# Altium PCB Board.PcbDoc (part 2 of 3)
Units mm, origin at the board's own origin, x right, y up, seen from the top; angles counter-clockwise.
Board outline 120 x 89 mm, 2 copper layers (Top Layer, Bottom Layer); 165 components, 194 nets, 816 pads, 265 vias.
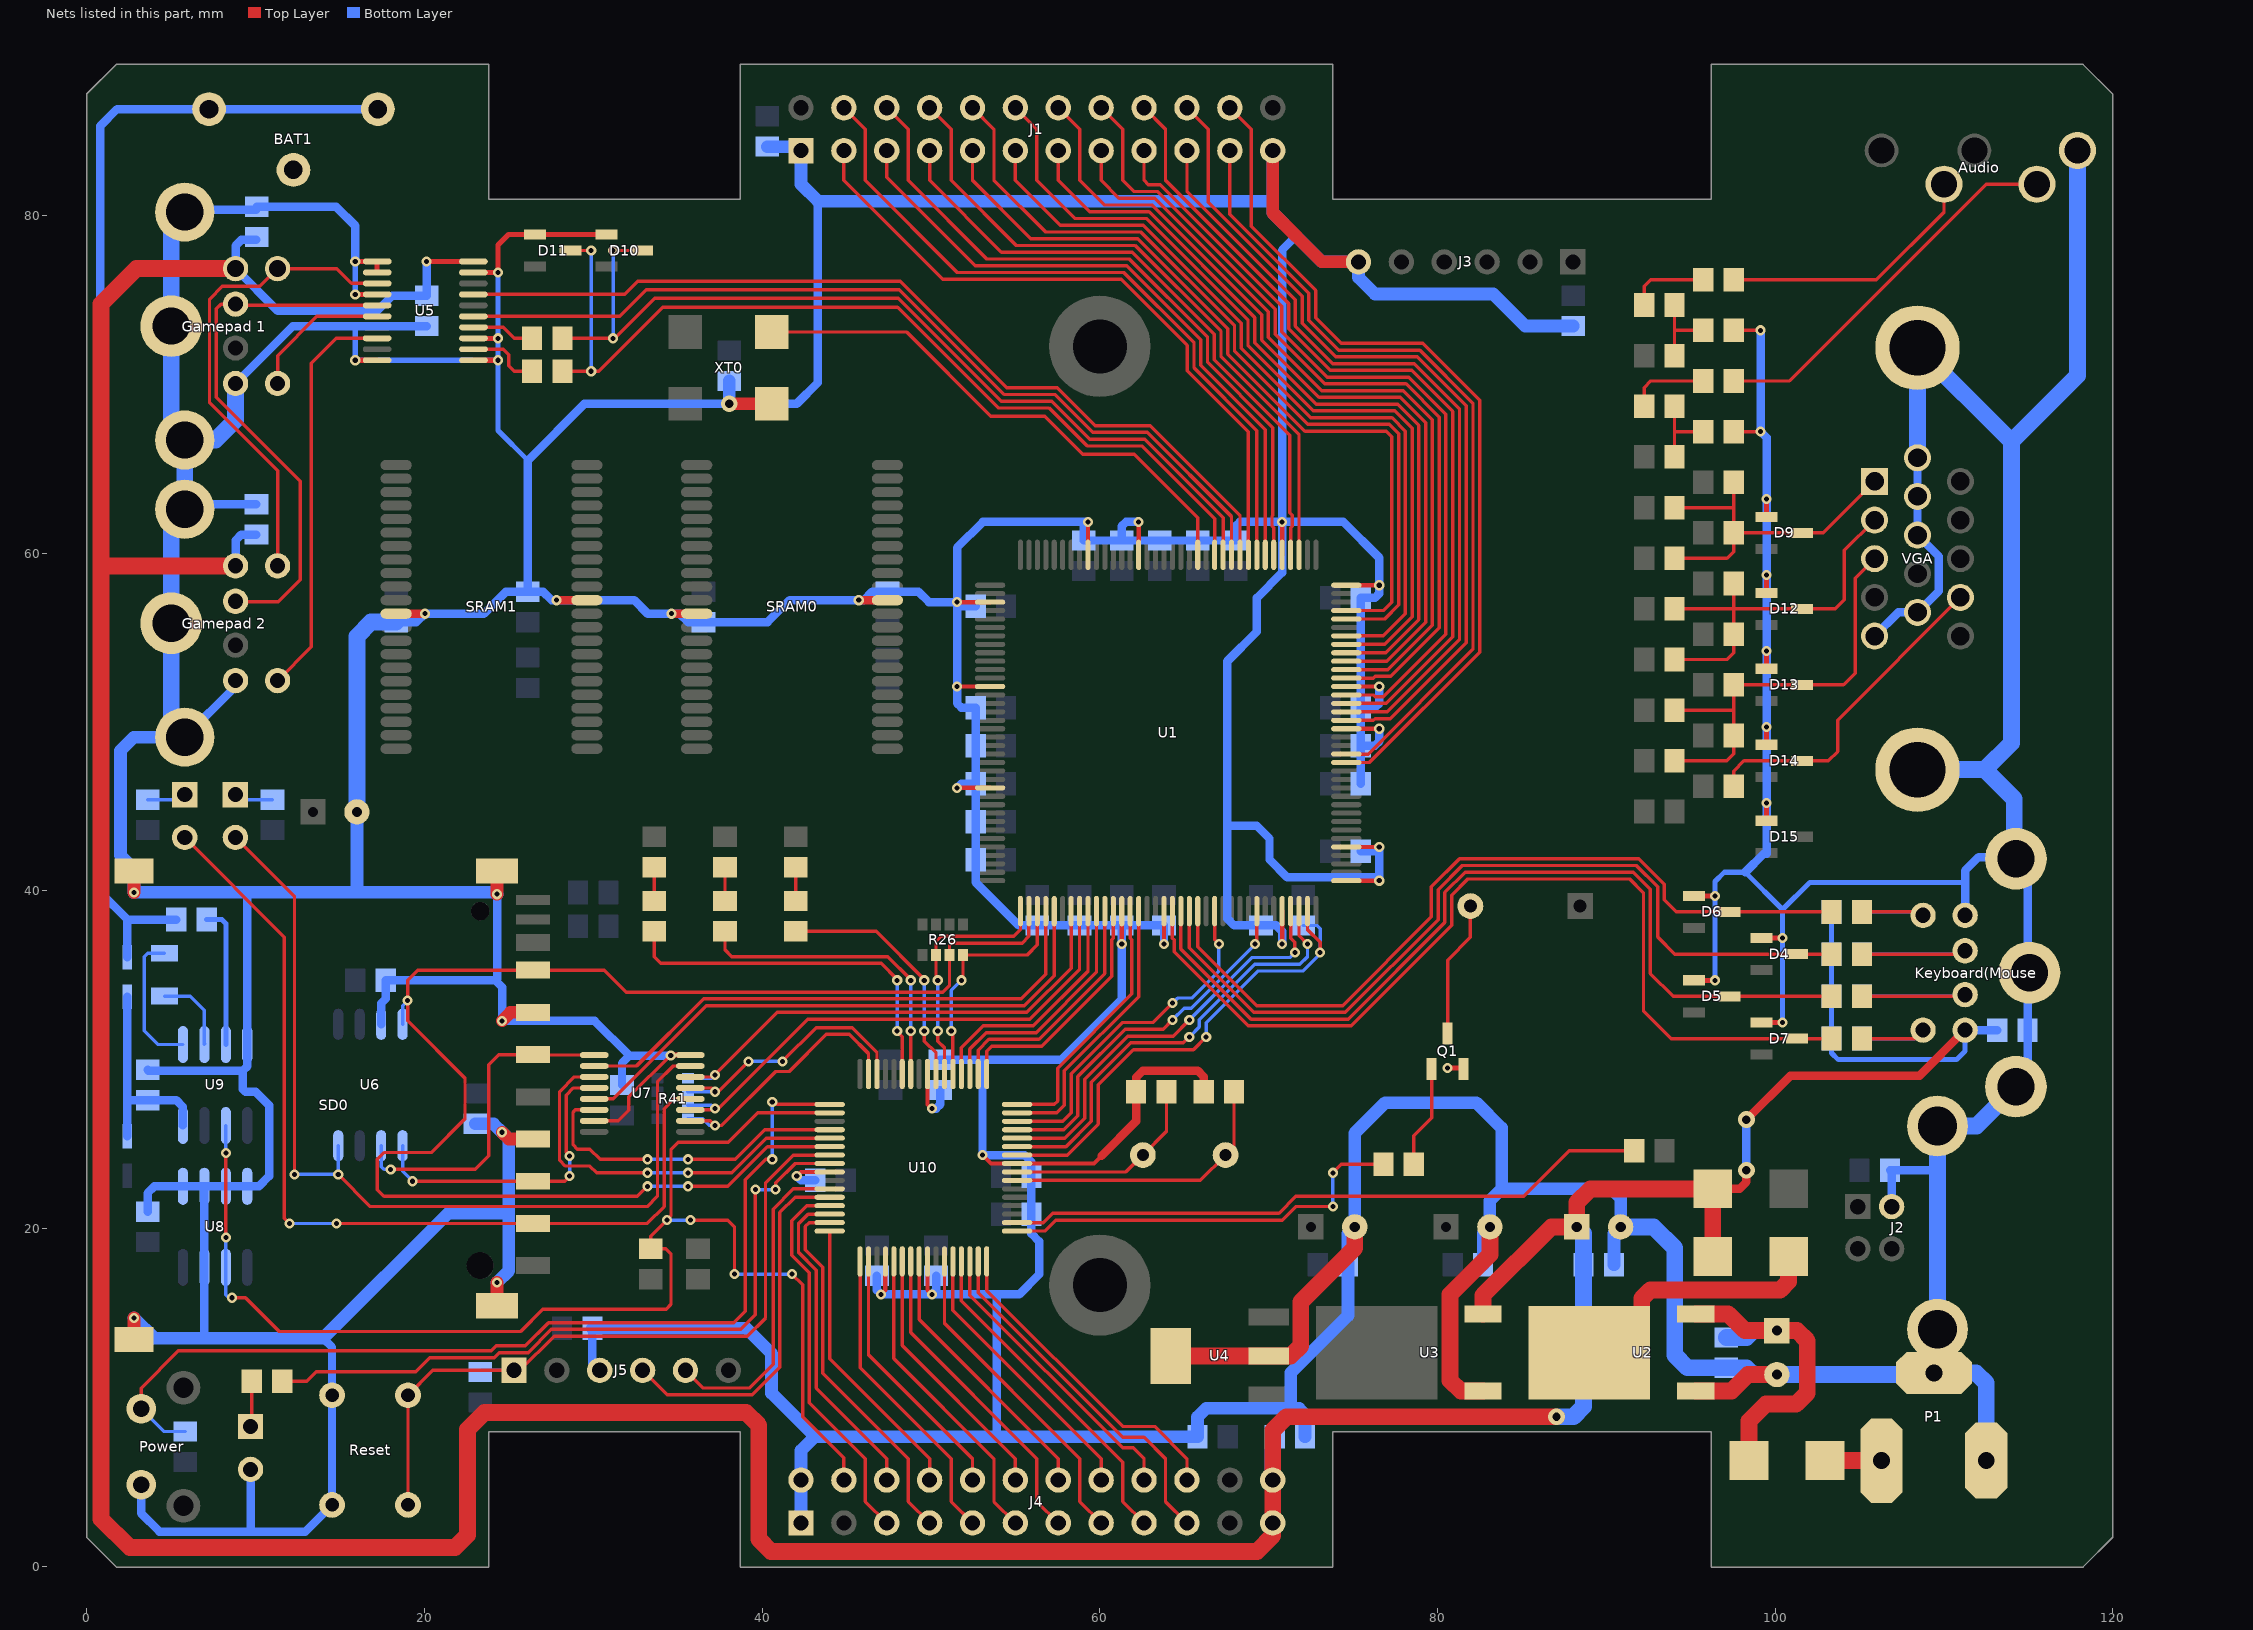
[diagram p2: the nets of this part, all layers, seen from the top]

## Via types
v1: diameter 0.6, hole 0.3, Top Layer to Bottom Layer, tented both sides, 246 vias
v2: diameter 1, hole 0.5, Top Layer to Bottom Layer, tented both sides, 18 vias
v3: diameter 1.5, hole 0.8, Top Layer to Bottom Layer, tented both sides, 1 vias

## Nets (pads, with @x,y where several pads share a name; then routed paths per layer and width w, separated by ;. In a path a pad name is that pad's centre, name@x,y a point inside that pad or via, vN(x,y) a via of type N, cw(c..) or ccw(c..) an arc to the next point about the centre after c; other vN are vias at no path point) (continued)
+5V: "Gamepad 1.5" "Gamepad 2.5" C26.1 C28.2 C51.2 C55.2 C57.2 C59.2 C60.2 D1.2 D3.2 J4.23 J4.24 Keyboard(Mouse.5 R15.1 R16.1 R17.1 R18.1 U3.3 U5.20 | length 298.3
  Top Layer w0.3: v1(20.125,77.275) U5.20@22.9,77.275
  Top Layer w0.5: D1.2@96.3,22.35 97.891,22.35 98.3,22.759 v2(98.3,23.45) ; v2(98.3,26.45) 100.9,29.05 108.55,29.05 111.25,31.75
  Top Layer w1: 8.81,59.25 0.85,59.25 ; 8.81,76.85 2.95,76.85 0.85,74.75 0.85,59.25 ; U3.3@82.7,14.93 82.7,16.05 86.75,20.1 C26.1@88.25,20.1 88.25,21.55 89.05,22.35 D1.2@96.3,22.35 D3.2@96.3,18.35 ; v2(87.05,8.85) 71.05,8.85 70.24,8.04 J4.24@70.24,5.1 J4.23@70.24,2.56 70.24,1.82 69.3,0.88 40.52,0.88 39.8,1.6 39.8,8.35 39.05,9.1 23.55,9.1 22.55,8.1 22.55,1.85 21.8,1.1 2.55,1.1 0.85,2.8 0.85,59.25
  Bottom Layer w0.3: R17.1@103.34,38.75 R18.1@103.34,31.25 103.34,30.4 103.74,30 110.74,30 111.25,30.51 111.25,31.75
  Bottom Layer w0.5: 8.81,59.25 8.81,60.76 9.15,61.1 C59.2@10.05,61.1 ; C57.2@10.05,78.55 9.15,78.55 8.81,78.21 8.81,76.85 11.31,74.35 17.2,74.35 18.1,75.25 C60.2@20.125,75.25 v1(20.125,77.275) ; v2(98.3,23.45) v2(98.3,26.45) ; 111.25,31.75 C51.2@113.15,31.75
  Bottom Layer w0.75: C55.2@70.24,7.56 C55.2@70.356,7.676
  Bottom Layer w1: J4.24@70.24,5.1 C55.2@70.24,7.56 ; v2(87.05,8.85) 88.05,8.85 88.65,9.45 C28.2@88.65,17.85 88.65,19.7 C26.1@88.25,20.1
BLUE: D13.3 R9.1 R10.1 R11.1 R12.1 VGA.3 | length 26
  Top Layer w0.2: R12.1@94.04,47.7 97.131,47.7 97.54,48.11 R11.1@97.54,49.2 R9.1@97.54,52.2 D13.3@101.59,52.2 104.05,52.2 104.74,52.89 104.74,58.52 VGA.3@105.89,59.67 ; R10.1@94.04,50.7 97.531,50.7
BUZZER: R47.1 U10.33 | length 24.5
  Top Layer w0.2: U10.33@55.1,19.85 56.75,19.85 57.4,20.5 70.8,20.5 71.6,21.3 v1(73.8,21.3) ; v1(73.8,23.3) 74.3,23.8 R47.1@76.8,23.8
  Bottom Layer w0.2: v1(73.8,21.3) v1(73.8,23.3)
CCLK: U1.70 U10.43 | length 26.4
  Top Layer w0.2: U10.43@55.1,24.85 57.997,24.85 59.5,26.353 59.5,28.672 61.827,30.998 64.948,30.998 v1(65.3,31.35) ; U1.70@71.8,38.8 71.8,37.35 v1(72.3,36.85)
  Bottom Layer w0.2: v1(65.3,31.35) 65.316,31.35 65.9,31.934 65.9,32.366 69.184,35.65 71.85,35.65 72.3,36.1 v1(72.3,36.85)
CLOCK: U1.123 XT0.3 | length 32.1
  Top Layer w0.2: XT0.3@40.425,73.1 48.55,73.1 53.55,68.1 56.74,68.1 58.99,65.85 62.05,65.85 65.8,62.1 U1.123@65.8,59.9
COMM1: U1.51 U10.47 | length 16.3
  Top Layer w0.2: U10.47@55.1,26.85 57.45,26.85 57.9,27.3 57.9,29.334 62.3,33.734 U1.51@62.3,38.8
COMM2: U1.50 U10.48 | length 15.6
  Top Layer w0.2: U10.48@55.1,27.35 57.3,27.35 57.5,27.55 57.5,29.5 61.9,33.9 61.9,37.099 61.8,37.199 U1.50@61.8,38.8
COMM3: U1.48 U10.49 | length 14.5
  Top Layer w0.2: U10.49@53.3,29.15 53.3,30.5 53.6,30.8 56.565,30.8 60.7,34.935 60.7,37.099 60.8,37.199 U1.48@60.8,38.8
COMM4: U1.47 U10.50 | length 14.5
  Top Layer w0.2: U10.50@52.8,29.15 52.8,30.566 53.434,31.2 56.4,31.2 60.3,35.1 U1.47@60.3,38.8
COMM5: U1.46 U10.51 | length 14.5
  Top Layer w0.2: U10.51@52.3,29.15 52.3,30.631 53.269,31.6 56.234,31.6 59.8,35.166 U1.46@59.8,38.8
COMM6: U1.45 U10.52 | length 14.5
  Top Layer w0.2: U10.52@51.8,29.15 51.8,30.697 53.103,32 56.068,32 59.3,35.232 U1.45@59.3,38.8
DIN: U1.65 U10.45 | length 22.1
  Top Layer w0.2: U10.45@55.1,25.85 57.866,25.85 58.7,26.684 58.7,29.003 61.495,31.798 63.748,31.798 v1(64.3,32.35) ; v1@69.24,36.85 v1(69.2,36.85) 69.3,36.95 U1.65@69.3,38.8
  Bottom Layer w0.2: v1(64.3,32.35) 65,33.05 65.416,33.05 69.2,36.834 v1(69.2,36.85)
DONE: R39.2 U1.71 U10.42 | length 30.1
  Top Layer w0.2: U10.42@55.1,24.35 58.063,24.35 59.9,26.187 59.9,28.506 61.992,30.598 65.548,30.598 v1(66.3,31.35) ; U1.71@72.3,38.8 72.3,37.699 73.05,36.949 v1(73.05,36.35)
  Bottom Layer w0.2: v1(66.3,31.35) 66.3,32.2 69.35,35.25 72.016,35.25 73.05,36.284 v1(73.05,36.35) 73.05,37.75 72.85,37.95 R39.2@72.05,37.95
FFLCS: R41.8 U1.43 U7.6 | length 30.3
  Top Layer w0.2: U7.6@35.75,28.975 37.075,28.975 v1(37.2,29.1) 40.9,32.8 55.684,32.8 58.3,35.416 U1.43@58.3,38.8
  Bottom Layer w0.2: R41.8@35.625,28.925 R41.8@35.6,28.9 37,28.9 v1(37.2,29.1)
FMOSI: U1.41 U7.13 | length 34.1
  Top Layer w0.2: U7.13@30.05,27.675 31.175,27.675 36.7,33.2 55.519,33.2 57.3,34.981 U1.41@57.3,38.8
FSCK: U1.40 U7.10 | length 32.7
  Top Layer w0.2: U7.10@30.05,29.625 32.559,29.625 36.534,33.6 55.353,33.6 56.8,35.047 U1.40@56.8,38.8
FSDCS: R41.4 U1.44 U7.3 | length 31.5
  Top Layer w0.2: U7.3@35.75,27.025 v1@37.125,27.025 ; v1(37.2,27.1) 37.4,27.1 42.7,32.4 55.85,32.4 58.8,35.35 U1.44@58.8,38.8
  Bottom Layer w0.2: R41.4@35.6,27.3 37,27.3 v1(37.2,27.1)
GND: "Gamepad 1.3" "Gamepad 1.MH1" "Gamepad 1.MH2" "Gamepad 1.MH3" "Gamepad 2.3" "Gamepad 2.MH1" "Gamepad 2.MH2" "Gamepad 2.MH3" Audio.1 BAT1.2 C1.1 C2.1 C3.1 C4.1 C5.1 C6.1 C7.1 C8.1 C9.1 C10.1 C11.1 C12.1 C13.1 C14.1 C15.1 C16.1 C17.1 C18.1 C19.1 C20.1 C21.1 C22.2 C23.1 C24.1 C25.2 C26.2 C27.2 C28.1 C29.1 C30.1 C31.1 C32.1 C33.1 C34.1 C35.1 C36.1 C37.1 C38.1 C39.2 C41.1 C43.1 C44.1 C45.1 C46.2 C47.2 C48.2 C49.2 C50.1 C51.1 C52.2 C53.1 C54.1 C55.1 C56.1 C57.1 C58.1 C59.1 C60.1 C61.2 C62.2 D4.1 D5.1 D6.1 D7.1 D8.2 D9.1 D10.1 D11.1 D12.1 D13.1 D14.1 D15.1 J1.1 J1.23 J2.4 J2.5 J2.6 J3.6 J4.1 J4.2 J5.3 Keyboard(Mouse.3 Keyboard(Mouse.MH1 Keyboard(Mouse.MH2 Keyboard(Mouse.MH3 P1.2 P1.3 Power.1 Q1.2 Reset.2 SD0.3 SD0.6 SD0.12 SD0.13 SD0.14 SD0.15 SRAM0.12 SRAM0.34 SRAM1.12 SRAM1.34 U1.3 U1.13 U1.25 U1.49 U1.54 U1.68 U1.73 U1.77 U1.91 U1.96 U1.108 U1.113 U1.130 U1.136 U2.1 U3.1 U4.2 U4.4 U5.1 U5.2 U5.4 U5.10 U5.11 U5.13 U5.19 U6.7 U7.8 U7.15 U8.1 U8.2 U8.3 U8.4 U8.7 U9.4 U10.9 U10.20 U10.25 U10.41 VGA.5 VGA.6 VGA.7 VGA.8 VGA.10 VGA.16 VGA.17 XT0.2 | length 1093.5
  Top Layer w0.2: U7.15@30.05,26.375 31.475,26.375 32.1,27 32.1,27.8 v1@34.575,30.275 ; C41.1@97.54,67.2 v1(99.14,67.2) ; C43.1@97.54,73.2 v1(99.14,73.2)
  Top Layer w0.254: v1(42.05,23.1) 42.3,23.35 U10.9@44,23.35 ; v1(47.05,16.1) 47.3,16.35 U10.20@47.3,18.05 ; U10.25@49.8,18.05 49.8,16.35 v1(50.05,16.1) ; v1(51.55,46.1) U1.25@53.5,46.1 ; v1(51.55,52.1) U1.13@53.5,52.1 ; v1(51.55,57.1) U1.3@53.5,57.1 ; v1(53.05,24.35) 53.55,23.85 U10.41@55.1,23.85 59.65,23.85 60.1,24.3 ; U1.136@59.3,59.9 v1(59.3,61.85) ; v1(61.3,36.85) U1.49@61.3,38.8 ; U1.130@62.3,59.9 v1(62.3,61.85) ; v1(63.8,36.85) U1.54@63.8,38.8 ; v1(70.8,36.85) U1.68@70.8,38.8 ; U1.113@70.8,59.9 v1(70.8,61.85) ; U1.73@74.6,40.6 v1(76.55,40.6) ; U1.77@74.6,42.6 v1(76.55,42.6) ; U1.91@74.6,49.6 v1(76.55,49.6) ; U1.96@74.6,52.1 v1(76.55,52.1) ; U1.108@74.6,58.1 v1(76.55,58.1)
  Top Layer w0.3: v1(15.9,71.425) U5.10@17.2,71.425 ; v1(15.9,75.325) U5.4@17.2,75.325 ; v1(15.9,77.275) U5.1@17.2,77.275 U5.2@17.2,76.625 ; U5.11@22.9,71.425 v1(24.35,71.425) ; U5.13@22.9,72.725 v1(24.35,72.725) ; U5.19@22.9,76.625 v1(24.35,76.625) 24.35,78.25 24.975,78.875 D11.1@26.55,78.875 D10.1@30.775,78.875 ; v1@34.575,30.275 U7.8@35.75,30.275 ; v1(80.6,29.5) Q1.2@81.5,29.5 ; D5.1@95.19,34.7 v1(96.44,34.7) ; D6.1@95.19,39.7 v1(96.44,39.7) ; D7.1@99.19,32.2 v1(100.44,32.2) ; D4.1@99.19,37.2 v1(100.44,37.2) ; D15.1@99.49,44.15 v1(99.49,45.2) ; D14.1@99.49,48.65 v1(99.49,49.7) ; D13.1@99.49,53.15 v1(99.49,54.2) ; D12.1@99.49,57.65 v1(99.49,58.7) ; D9.1@99.49,62.15 v1(99.49,63.2)
  Top Layer w0.5: SRAM1.34@18.323,56.414 v1(20.023,56.414) ; v1(27.823,57.214) SRAM1.12@29.623,57.214 ; v1@34.575,30.275 34.575,30.253 v1(34.588,30.24) ; v1(34.623,56.414) SRAM0.34@36.123,56.414 ; v1(45.723,57.214) SRAM0.12@47.423,57.214 ; 60.1,24.3 62.15,26.35 C54.1@62.15,28.1 62.15,28.95 62.55,29.35 65.8,29.35 66.15,29 C53.1@66.15,28.1
  Top Layer w0.75: SD0.15@2.8,13.425 v1(2.8,14.7) ; v1(2.8,39.9) SD0.13@2.8,41.175 ; SD0.14@24.3,15.425 v1(24.3,16.8) ; v1(24.3,39.8) SD0.12@24.3,41.175 ; v1(24.6,25.7) 25,25.3 SD0.3@26.425,25.3 ; v1(24.6,32.3) 25.1,32.8 SD0.6@26.425,32.8 ; v2(38.05,68.85) XT0.2@40.425,68.85 ; J1.23@70.24,83.84 70.24,80.16 73.15,77.25 J3.6@75.32,77.25
  Top Layer w1: U4.4@64.2,12.45 U4.2@70,12.45 71.3,12.45 71.9,13.05 71.9,15.65 75.1,18.85 C25.2@75.1,20.1 ; U3.1@82.7,10.37 81.38,10.37 80.75,11 80.75,16.1 83.1,18.45 C27.2@83.1,20.1 ; U2.1@95.3,10.37 97.42,10.37 98.4,11.35 C22.2@100.1,11.35
  Bottom Layer w0.3: 15.9,73.45 v1(15.9,71.425) v1(24.35,71.425) ; v1(15.9,75.325) v1(15.9,77.275) ; v1(24.35,76.625) v1(24.35,72.725) v1(24.35,71.425) ; 26.123,65.498 24.35,67.271 v1(24.35,71.425) ; v1(96.44,34.7) v1(96.44,39.7) 96.44,40.549 96.99,41.1 98.23,41.1 100.44,38.89 ; v1(100.44,32.2) v1(100.44,37.2) 100.44,38.89 ; 111.25,40.5 102.05,40.5 100.44,38.89
  Bottom Layer w0.5: Power.1@3.225,4.825 3.225,3.125 4.3,2.05 12.95,2.05 Reset.2@14.525,3.625 Reset.2@14.525,10.125 14.525,12.975 14,13.5 ; C39.2@3.6,21 3.6,22.1 4,22.5 U8.1@5.695,22.5 U8.2@6.965,22.5 ; C62.2@3.6,29.4 3.65,29.35 9.25,29.35 ; 5.8,49.1 8.81,52.11 8.81,52.45 ; 5.8,62.6 6.1,62.9 C59.1@10.05,62.9 ; 5.8,80.2 5.95,80.35 C57.1@10.05,80.35 ; 6.965,13.5 U8.7@6.965,17.7 U8.2@6.965,22.5 ; 8.81,70.05 12.21,73.45 15.9,73.45 C60.1@20.125,73.45 ; 9.505,39.82 U9.4@9.505,30.9 9.505,29.605 9.25,29.35 ; 9.7,2.075 D8.2@9.7,5.735 ; C57.1@10.07,80.52 14.77,80.52 15.9,79.39 v1(15.9,77.275) ; U6.7@17.435,32.1 17.435,33.335 17.7,33.6 C58.1@17.7,34.7 24.2,34.7 ; C33.1@18.323,55.914 19.523,55.914 v1(20.023,56.414) 23.523,56.414 24.823,57.714 C32.1@26.123,57.714 ; v1(24.3,39.8) 24.3,34.8 24.2,34.7 ; C45.1@29.95,14.1 29.95,12.03 J5.3@30.38,11.6 ; C38.1@31.7,28.5 31.7,29.8 32.14,30.24 ; v1(34.588,30.24) 32.14,30.24 ; v1(42.05,23.1) 42.3,22.85 C48.2@43.15,22.85 ; 43.3,80.85 43.3,70.1 42.05,68.85 v2(38.05,68.85) 29.475,68.85 26.123,65.498 C32.1@26.123,57.714 ; C49.2@46.8,17.2 46.8,16.35 v1(47.05,16.1) v1(50.05,16.1) ; C52.2@50.3,17.2 50.3,16.35 v1(50.05,16.1) ; C44.1@50.55,30 53.05,30 ; v1(51.55,46.1) 51.8,46.35 C12.1@52.65,46.35 ; C1.1@52.65,56.85 51.8,56.85 v1(51.55,57.1) ; 53.89,7.676 53.89,16.1 ; v1(62.3,61.85) 61.55,61.85 61.3,61.6 C16.1@61.3,60.75 ; v1(63.8,36.85) C14.1@63.8,37.95 C19.1@61.3,37.95 ; v1(70.8,36.85) 70.8,37.6 70.45,37.95 C5.1@69.55,37.95 67.95,37.95 67.55,38.35 67.55,43.85 ; 71.625,78.775 70.8,77.95 v1(70.8,61.85) ; C6.1@75.45,42.35 76.3,42.35 v1(76.55,42.6) v1(76.55,40.6) 76.35,40.8 71.1,40.8 70.05,41.85 70.05,43.1 69.3,43.85 67.55,43.85 ; C7.1@75.45,46.35 C20.1@75.45,48.6 ; v1(76.55,49.6) 76.55,48.85 76.3,48.6 C20.1@75.45,48.6 ; v1(76.55,52.1) 76.55,51.1 76.3,50.85 C15.1@75.45,50.85 ; 98.23,41.1 99.33,42.2 99.49,42.2 v1(99.49,45.2) v1(99.49,49.7) v1(99.49,54.2) v1(99.49,58.7) v1(99.49,63.2) 99.49,66.85 v1(99.14,67.2) v1(99.14,73.2) ; VGA.5@105.89,55.09 107.29,56.49 VGA.10@108.43,56.49 109.7,57.76 109.7,59.8 VGA.8@108.43,61.07 VGA.7@108.43,63.36 VGA.6@108.43,65.65 ; J2.4@106.9,21.3 106.9,23.35 C23.1@106.8,23.45 109.61,23.45 ; 111.25,38.55 111.25,40.5 111.25,41.2 112.05,42 114.16,42 114.26,41.9 114.95,41.21 114.95,35.04 ; 114.26,28.4 114.95,29.09 C51.1@114.95,31.75 114.95,35.04 ; 115.06,35.15 114.95,35.04 ; U8.2@6.965,22.5 U8.3@8.235,22.5 U8.4@9.505,22.5 10.2,22.5 10.8,23.1 10.8,27.3 10,28.1 9.4,28.1 9.25,28.25 9.25,29.35 ; 24.2,34.7 24.6,34.3 v1(24.6,32.3) 30.079,32.3 32.14,30.24 ; C32.1@26.123,57.714 27.023,57.714 27.523,57.214 v1(27.823,57.214) 32.423,57.214 33.223,56.414 v1(34.623,56.414) 35.123,56.414 35.623,55.914 C31.1@36.523,55.914 40.323,55.914 41.623,57.214 v1(45.723,57.214) 46.023,57.214 46.523,57.714 C30.1@47.423,57.714 49.261,57.714 49.875,57.1 v1(51.55,57.1) ; v1(50.05,16.1) 53.89,16.1 ; v1(51.55,57.1) 51.55,60.325 53.075,61.85 v1(59.3,61.85) 59.05,61.6 C11.1@59.05,60.75 C16.1@61.3,60.75 ; v1(51.55,57.1) v1(51.55,52.1) 51.55,51.1 51.8,50.85 C2.1@52.65,50.85 C17.1@52.65,48.6 C12.1@52.65,46.35 ; C12.1@52.65,46.35 C18.1@52.65,44.1 C3.1@52.65,41.85 52.65,40.5 55.2,37.95 C13.1@56.3,37.95 C19.1@61.3,37.95 ; 53.05,30 v1(53.05,24.35) 55.55,24.35 55.95,23.95 C46.2@55.95,23.1 C47.2@55.95,20.85 55.95,19.7 56.409,19.241 56.409,17.284 55.225,16.1 53.89,16.1 ; 53.05,30 57.725,30 61.3,33.575 v1(61.3,36.85) C19.1@61.3,37.95 ; C16.1@61.3,60.75 C10.1@65.8,60.75 C9.1@68.05,60.75 68.05,61.6 68.3,61.85 v1(70.8,61.85) ; 67.55,43.85 67.55,53.6 69.3,55.35 69.3,57.35 70.8,58.85 v1(70.8,61.85) ; v1(70.8,61.85) 74.425,61.85 76.55,59.725 v1(76.55,58.1) 76.55,57.6 76.3,57.35 C8.1@75.45,57.35 C15.1@75.45,50.85 ; C20.1@75.45,48.6 C15.1@75.45,50.85
  Bottom Layer w0.75: v1(2.8,14.7) 4,13.5 14,13.5 21.4,20.9 25,20.9 ; v1(2.8,39.9) 2.8,41.3 2,42.1 2,48.3 2.8,49.1 5.8,49.1 ; v1@2.825,39.925 16,39.925 ; 5,61.8 5.8,62.6 ; C61.2@16,44.675 16,39.925 ; C34.1@23,26.2 24.1,26.2 v1(24.6,25.7) 25,25.3 25,20.9 ; v1(24.3,16.8) 25,17.5 25,20.9 ; v1(24.3,39.8) 24.176,39.925 16,39.925 ; C45.1@29.95,14.1 39.05,14.1 40.55,12.6 40.55,10.252 43.126,7.676 ; v2(38.05,68.85) C35.1@38.05,70.2 ; C37.1@40.3,84.08 42.06,84.08 J1.1@42.3,83.84 42.3,81.85 43.3,80.85 70.24,80.85 ; J4.1@42.3,2.56 J4.2@42.3,5.1 42.3,6.85 43.126,7.676 ; J1.23@70.24,83.84 70.24,80.85 ; C55.1@72.156,7.676 72.156,8.994 71.8,9.35 71.3,9.35 ; C29.1@82.7,17.85 82.7,19.7 C27.2@83.1,20.1 83.1,21.65 83.8,22.35 ; C36.1@88.05,73.45 85.2,73.45 83.3,75.35 76.3,75.35 75.32,76.33 J3.6@75.32,77.25 73.15,77.25 71.625,78.775 70.24,80.16 70.24,80.85 ; C28.1@90.45,17.85 90.45,19.7 C26.2@90.85,20.1 90.85,21.8 90.3,22.35 83.8,22.35 ; 43.126,7.676 53.89,7.676 C56.1@65.784,7.676 65.784,8.834 66.3,9.35 71.3,9.35 ; 71.3,9.35 71.3,11.45 74.7,14.85 C50.1@74.7,17.85 74.7,19.7 C25.2@75.1,20.1 75.1,25.65 76.9,27.45 82.3,27.45 83.8,25.95 83.8,22.35
  Bottom Layer w1: 5,61.8 5,55.85 5,49.9 5.8,49.1 ; 5.8,62.6 5.8,66.7 ; 5.8,80.2 5,79.4 5,73.45 5,67.5 5.8,66.7 ; 8.81,70.05 8.81,67.875 7.635,66.7 5.8,66.7 ; C61.2@16,44.675 16,55.075 16.839,55.914 C33.1@18.323,55.914 ; C26.2@90.85,20.1 92.8,20.1 94.05,18.85 94.05,12.5 94.8,11.75 C24.1@97.1,11.75 98.3,11.75 98.7,11.35 C22.2@100.1,11.35 109.3,11.35 P1.3@109.4,11.45 ; VGA.17@108.43,47.175 112.415,47.175 ; VGA.6@108.43,65.65 VGA.16@108.43,72.165 113.99,66.605 ; P1.2@112.5,6.25 112.5,10.85 111.9,11.45 P1.3@109.4,11.45 ; 114.16,42 114.16,45.43 112.415,47.175 ; 114.26,28.4 111.93,26.07 J2.5@109.61,26.07 109.61,23.45 J2.6@109.61,14.03 109.4,13.82 P1.3@109.4,11.45 ; Audio.1@117.9,83.85 117.9,70.515 113.99,66.605 ; 112.415,47.175 113.99,48.75 113.99,66.605
GPIO1: J4.5 U10.13 | length 22.8
  Top Layer w0.2: U10.13@44,21.35 42.651,21.35 41.754,20.453 41.754,18.415 42.8,17.369 42.8,9.68 46.11,6.37 46.11,3.83 J4.5@47.38,2.56
GPIO2: J4.6 U10.14 | length 19.4
  Top Layer w0.2: U10.14@44,20.85 42.716,20.85 42.154,20.288 42.154,18.58 43.2,17.534 43.2,10.55 47.38,6.37 J4.6@47.38,5.1
GPIO3: J4.7 U10.15 | length 22.2
  Top Layer w0.2: U10.15@44,20.35 42.782,20.35 42.554,20.122 42.554,18.746 43.6,17.7 43.6,11.42 48.65,6.37 48.65,3.83 J4.7@49.92,2.56
GPIO4: J4.8 U10.16 | length 17.2
  Top Layer w0.2: U10.16@44,19.85 44,12.29 49.92,6.37 J4.8@49.92,5.1
GPIO5: J4.9 U10.17 | length 18.2
  Top Layer w0.2: U10.17@45.8,18.05 45.8,11.76 51.19,6.37 51.19,3.83 J4.9@52.46,2.56
GPIO6: J4.10 U10.18 | length 15.5
  Top Layer w0.2: U10.18@46.3,18.05 46.3,12.53 52.46,6.37 J4.10@52.46,5.1
GPIO7: J4.11 U10.21 | length 18.5
  Top Layer w0.2: U10.21@47.8,18.05 47.8,12.3 53.73,6.37 53.73,3.83 J4.11@55,2.56
GPIO8: J4.12 U10.22 | length 15.7
  Top Layer w0.2: U10.22@48.3,18.05 48.3,13.07 55,6.37 J4.12@55,5.1
GPIO9: J4.13 U10.23 | length 19.1
  Top Layer w0.2: U10.23@48.8,18.05 48.8,13.84 56.27,6.37 56.27,3.83 J4.13@57.54,2.56
GPIO10: J4.14 U10.24 | length 16.4
  Top Layer w0.2: U10.24@49.3,18.05 49.3,14.61 57.54,6.37 J4.14@57.54,5.1
GPIO11: J4.15 U10.27 | length 19.3
  Top Layer w0.2: U10.27@50.8,18.05 50.8,14.38 58.81,6.37 58.81,3.83 J4.15@60.08,2.56
GPIO12: J4.16 U10.28 | length 16.6
  Top Layer w0.2: U10.28@51.3,18.05 51.3,15.15 60.08,6.37 J4.16@60.08,5.1
GPIO13: J4.17 U10.29 | length 20
  Top Layer w0.2: U10.29@51.8,18.05 51.8,15.713 61.35,6.163 61.35,3.83 J4.17@62.62,2.56
GPIO14: J4.18 U10.30 | length 17.6
  Top Layer w0.2: U10.30@52.3,18.05 52.3,16.055 61.35,7.005 61.985,7.005 62.62,6.37 J4.18@62.62,5.1
GPIO15: J4.19 U10.31 | length 21.4
  Top Layer w0.2: U10.31@52.8,18.05 52.8,16.19 61.35,7.64 62.62,7.64 63.89,6.37 63.89,3.83 J4.19@65.16,2.56
GPIO16: J4.20 U10.32 | length 19
  Top Layer w0.2: U10.32@53.3,18.05 53.3,16.325 61.35,8.275 63.255,8.275 65.16,6.37 J4.20@65.16,5.1
GREEN: D12.3 R5.1 R6.1 R7.1 R8.1 VGA.2 | length 23.5
  Top Layer w0.2: R8.1@94.04,53.7 97.131,53.7 97.54,54.11 R7.1@97.54,55.2 97.54,56.7 ; R6.1@94.04,56.7 97.54,56.7 ; R5.1@97.54,58.2 97.54,56.7 ; VGA.2@105.89,61.96 104.1,60.17 104.1,57.25 103.55,56.7 D12.3@101.59,56.7 97.54,56.7
HSYNC: D14.3 R13.1 VGA.14 | length 19.7
  Top Layer w0.2: R13.1@97.54,46.2 97.54,47.09 98.15,47.7 D14.3@101.59,47.7 103.15,47.7 103.7,48.25 103.7,50.11 VGA.14@110.97,57.38
INIT_B: R26.7 U1.39 U10.53 | length 14
  Top Layer w0.2: v1(51.2,31.7) 51.3,31.6 U10.53@51.3,29.15 ; v1(51.8,34.7) 51.9,34.8 R26.7@51.9,36.2 55.7,36.2 56.3,36.8 U1.39@56.3,38.8
  Bottom Layer w0.2: v1(51.2,31.7) 51.2,34.1 v1(51.8,34.7)
IO0: J1.3 U1.117 | length 40.1
  Top Layer w0.2: J1.3@44.84,83.84 44.84,82.076 50.694,76.222 61.259,76.222 65.18,72.301 65.18,70.8 68.8,67.18 U1.117@68.8,59.9
IO1: J1.4 U1.116 | length 42.4
  Top Layer w0.2: J1.4@44.84,86.38 46.11,85.11 46.11,82.076 51.564,76.622 61.424,76.622 65.58,72.466 65.58,70.966 69.3,67.246 U1.116@69.3,59.9
IO2: J1.5 U1.115 | length 38.5
  Top Layer w0.2: J1.5@47.38,83.84 47.38,82.261 52.619,77.022 61.59,77.022 65.98,72.632 65.98,71.131 69.8,67.311 U1.115@69.8,59.9
IO3: J1.6 U1.114 | length 41
  Top Layer w0.2: J1.6@47.38,86.38 48.65,85.11 48.65,82.076 53.304,77.422 61.756,77.422 66.38,72.798 66.38,71.297 70.24,67.437 70.24,62.239 70.2,62.199 70.2,61.601 70.3,61.501 U1.114@70.3,59.9
IO4: J1.7 U1.112 | length 37.4
  Top Layer w0.2: J1.7@49.92,83.84 49.92,82.076 54.174,77.822 61.921,77.822 66.78,72.963 66.78,71.463 71.256,66.987 71.256,62.387 71.4,62.243 71.4,61.601 71.3,61.501 U1.112@71.3,59.9
IO5: J1.8 U1.111 | length 39.7
  Top Layer w0.2: J1.8@49.92,86.38 51.19,85.11 51.19,82.076 55.044,78.222 62.087,78.222 67.18,73.129 67.18,71.628 71.8,67.008 U1.111@71.8,59.9
IO6: J1.9 U1.105 | length 46.5
  Top Layer w0.2: J1.9@52.46,83.84 52.46,83.6 52.46,82.076 55.914,78.622 62.253,78.622 67.58,73.295 67.58,71.794 72.15,67.224 76.976,67.224 77.3,66.9 77.3,57.1 76.8,56.6 U1.105@74.6,56.6
IO7: J1.10 U1.104 | length 49.5
  Top Layer w0.2: J1.10@52.46,86.38 53.73,85.11 53.73,82.076 56.784,79.022 62.419,79.022 67.98,73.461 67.98,71.96 72.316,67.624 77.142,67.624 77.7,67.066 77.7,56.934 76.866,56.1 U1.104@74.6,56.1
IO8: J1.11 U1.102 | length 46.8
  Top Layer w0.2: J1.11@55,83.84 55,82.076 57.654,79.422 62.584,79.422 68.38,73.626 68.38,72.125 72.481,68.024 77.307,68.024 78.1,67.231 78.1,56.4 76.8,55.1 U1.102@74.6,55.1
IO9: J1.12 U1.101 | length 49.8
  Top Layer w0.2: J1.12@55,86.38 56.27,85.11 56.27,82.076 58.524,79.822 62.75,79.822 68.78,73.792 68.78,72.291 72.647,68.424 77.473,68.424 78.5,67.397 78.5,56.234 76.866,54.6 U1.101@74.6,54.6
IO10: J1.13 U1.100 | length 46.6
  Top Layer w0.2: J1.13@57.54,83.84 57.54,82.076 59.394,80.222 62.916,80.222 69.18,73.958 69.18,72.457 72.813,68.824 77.639,68.824 78.9,67.563 78.9,56.069 76.931,54.1 U1.100@74.6,54.1
IO11: J1.14 U1.99 | length 49.6
  Top Layer w0.2: J1.14@57.54,86.38 58.81,85.11 58.81,82.076 60.264,80.622 63.081,80.622 69.58,74.123 69.58,72.623 72.979,69.224 77.805,69.224 79.3,67.729 79.3,55.903 76.997,53.6 U1.99@74.6,53.6
IO12: J1.15 U1.98 | length 46.5
  Top Layer w0.2: J1.15@60.08,83.84 60.08,82.076 61.134,81.022 63.247,81.022 69.98,74.289 69.98,72.788 73.144,69.624 77.97,69.624 79.7,67.894 79.7,55.737 77.063,53.1 U1.98@74.6,53.1
IO13: J1.16 U1.97 | length 49.5
  Top Layer w0.2: J1.16@60.08,86.38 61.35,85.11 61.35,82.076 62.004,81.422 63.413,81.422 70.38,74.455 70.38,72.954 73.31,70.024 78.136,70.024 80.1,68.06 80.1,55.572 77.228,52.7 76.301,52.7 76.201,52.6 U1.97@74.6,52.6
IO14: J1.17 U1.95 | length 46.8
  Top Layer w0.2: J1.17@62.62,83.84 62.62,82.076 62.874,81.822 63.578,81.822 70.78,74.62 70.78,73.12 73.476,70.424 78.302,70.424 80.5,68.226 80.5,55.201 76.799,51.5 76.301,51.5 76.201,51.6 U1.95@74.6,51.6
IO15: J1.18 U1.94 | length 49.7
  Top Layer w0.2: J1.18@62.62,86.38 63.89,85.11 63.89,82.076 71.18,74.786 71.18,73.285 73.641,70.824 78.467,70.824 80.9,68.391 80.9,55.036 76.964,51.1 U1.94@74.6,51.1
IO16: J1.19 U1.93 | length 47
  Top Layer w0.2: J1.19@65.16,83.84 65.16,81.43 71.58,75.01 71.58,73.451 73.807,71.224 78.633,71.224 81.3,68.557 81.3,54.87 77.03,50.6 U1.93@74.6,50.6
IO17: J1.20 U1.92 | length 50.4
  Top Layer w0.2: J1.20@65.16,86.38 66.43,85.11 66.43,80.779 71.98,75.229 71.98,73.617 73.973,71.624 78.799,71.624 81.7,68.723 81.7,54.704 77.196,50.2 76.301,50.2 76.201,50.1 U1.92@74.6,50.1
IO18: J1.21 U1.88 | length 48.4
  Top Layer w0.2: J1.21@67.7,83.84 67.7,80.074 72.38,75.394 72.38,73.782 74.138,72.024 78.964,72.024 82.1,68.888 82.1,54.301 75.899,48.1 U1.88@74.6,48.1
IO19: J1.22 U1.87 | length 51.8
  Top Layer w0.2: J1.22@67.7,86.38 68.97,85.11 68.97,79.37 72.78,75.56 72.78,73.948 74.304,72.424 79.13,72.424 82.5,69.054 82.5,54.136 75.964,47.6 U1.87@74.6,47.6
JOY_CLK: "Gamepad 1.2" "Gamepad 2.2" U5.5 | length 32.1
  Top Layer w0.2: 8.81,57.15 8.835,57.125 11.35,57.125 12.65,58.425 12.65,64.25 7.67,69.23 7.67,74.47 7.95,74.75 8.81,74.75 ; 8.885,74.675 U5.5@17.2,74.675
JOY_DATA0: "Gamepad 1.6" U5.6 | length 8.5
  Top Layer w0.2: 11.3,70.05 11.3,71.7 13.625,74.025 U5.6@17.2,74.025
JOY_DATA1: "Gamepad 2.6" U5.8 | length 24.1
  Top Layer w0.2: 11.3,52.45 13.3,54.45 13.3,71.25 14.775,72.725 U5.8@17.2,72.725
JOY_LOAD: "Gamepad 1.8" "Gamepad 2.8" U5.3 | length 28.5
  Top Layer w0.2: 11.3,59.25 11.3,64.875 7.27,68.905 7.27,75.045 8.025,75.8 10.25,75.8 11.3,76.85 14.8,76.85 15.675,75.975 U5.3@17.2,75.975
JOYSTICK_CLK: U1.119 U5.15 | length 53.4
  Top Layer w0.2: U5.15@22.9,74.025 31.566,74.025 33.141,75.6 48.121,75.6 54.321,69.4 57.321,69.4 59.571,67.15 62.821,67.15 67.8,62.171 U1.119@67.8,59.9
JOYSTICK_DATA0: D10.3 R35.1 U1.120 | length 54.6
  Top Layer w0.2: R35.1@28.175,72.725 v1(31.175,72.725) 31.259,72.725 33.634,75.1 48.056,75.1 54.156,69 57.156,69 59.406,66.75 62.656,66.75 67.3,62.106 U1.120@67.3,59.9 ; v1(31.175,77.925) D10.3@32.875,77.925
  Bottom Layer w0.2: v1(31.175,72.725) v1(31.175,77.925)
JOYSTICK_DATA1: D11.3 R36.1 U1.121 | length 55.9
  Top Layer w0.2: R36.1@28.175,70.775 v1(29.875,70.775) 30.316,70.775 34.111,74.57 48.02,74.57 53.99,68.6 56.99,68.6 59.24,66.35 62.49,66.35 66.8,62.04 U1.121@66.8,59.9 ; D11.3@28.65,77.925 v1(29.875,77.925)
  Bottom Layer w0.2: v1(29.875,70.775) v1(29.875,77.925)
JOYSTICK_LOAD: U1.118 U5.17 | length 53.8
  Top Layer w0.2: U5.17@22.9,75.325 31.866,75.325 32.641,76.1 48.187,76.1 54.487,69.8 57.487,69.8 59.737,67.55 62.987,67.55 68.3,62.237 U1.118@68.3,59.9
KBCLK: Keyboard(Mouse.6 R17.2 R21.2 | length 7.4
  Top Layer w0.2: R21.2@105.14,38.75 108.56,38.75 108.76,38.55
  Bottom Layer w0.2: R17.2@105.14,38.75 108.56,38.75 108.76,38.55
KBDAT: Keyboard(Mouse.1 R15.2 R19.2 | length 12.4
  Top Layer w0.2: R19.2@105.14,36.25 111.05,36.25 111.25,36.45
  Bottom Layer w0.2: R15.2@105.14,36.25 111.05,36.25 111.25,36.45
LED1: D17.2 U10.55 | length 14.7
  Top Layer w0.2: D17.2@42,37.6 46.749,37.6 49.6,34.749 v1(49.6,34.7) ; v1(49.6,31.7) 49.6,31.1 50.3,30.4 U10.55@50.3,29.15
  Bottom Layer w0.2: v1(49.6,31.7) v1(49.6,34.7)
LED2: D18.2 U10.58 | length 18.2
  Top Layer w0.2: D18.2@37.8,37.6 37.8,36.5 38.2,36.1 47.449,36.1 48.8,34.749 v1(48.8,34.7) ; U10.58@48.8,29.15 v1@48.8,31.5
  Bottom Layer w0.2: v1(48.8,31.7) v1(48.8,34.7)
LED3: D19.2 U10.59 | length 22.2
  Top Layer w0.2: D19.2@33.6,37.6 33.6,36.1 34,35.7 47.049,35.7 48,34.749 v1(48,34.7) ; v1(48,31.7) 48,31.651 48.3,31.351 U10.59@48.3,29.15
  Bottom Layer w0.2: v1(48,31.7) v1(48,34.7)
M0: U1.69 U10.44 | length 24.9
  Top Layer w0.2: U10.44@55.1,25.35 57.931,25.35 59.1,26.519 59.1,28.837 61.661,31.398 64.348,31.398 v1(65.3,32.35) ; U1.69@71.3,38.8 71.3,37.199 71.55,36.949 v1(71.55,36.35)
  Bottom Layer w0.2: v1(65.3,32.35) 69,36.05 71.25,36.05 v1(71.55,36.35)
M1: U1.60 U10.46 | length 20.6
  Top Layer w0.2: U10.46@55.1,26.35 57.8,26.35 58.3,26.85 58.3,29.169 61.329,32.198 63.148,32.198 v1(64.3,33.35) ; U1.60@66.8,38.8 66.8,37.1 v1(67.05,36.85)
  Bottom Layer w0.2: v1(64.3,33.35) 64.6,33.65 65.45,33.65 67.05,35.25 v1(67.05,36.85)
MCLR: J5.1 R32.1 Reset.1 U10.7 | length 44
  Top Layer w0.2: Reset.1@19.025,3.625 Reset.1@19.025,10.125 20.5,11.6 J5.1@25.3,11.6 25.653,11.6 27.678,13.625 39.125,13.625 40.2,14.7 40.2,22.7 41.85,24.35 U10.7@44,24.35
  Bottom Layer w0.2: R32.1@23.4,11.6 J5.1@25.3,11.6
MFLCS: D16.2 U6.4 U7.7 | length 54.8
  Top Layer w0.2: D16.2@8.8,43.16 12.305,39.655 v1(12.305,23.205) ; v1(14.895,23.205) 16.8,21.3 33.2,21.3 33.8,21.9 33.8,28.7 34.725,29.625 U7.7@35.75,29.625
  Bottom Layer w0.2: v1(12.305,23.205) v1(14.895,23.205) U6.4@14.895,24.9
MMISO: R26.5 SD0.7 U1.38 U6.8 U10.6 | length 89.2
  Top Layer w0.2: v1(33.2,22.5) 32.6,21.9 17.6,21.9 17.2,22.3 17.2,24.1 17.6,24.5 20.4,24.5 22.4,26.5 22.4,28.9 19,32.3 v1(19,33.5) 19,34.71 19.59,35.3 SD0.7@26.425,35.3 30.64,35.3 31.94,34 50.7,34 51.1,34.4 R26.5@51.1,36.2 51.1,36.8 51.2,36.9 55.4,36.9 55.8,37.3 U1.38@55.8,38.8 ; v1(35.6,22.5) 37.966,22.5 40.316,24.85 U10.6@44,24.85
  Bottom Layer w0.2: U6.8@18.705,32.1 18.705,33.205 v1(19,33.5) ; v1(33.2,22.5) v1(35.6,22.5)
MMOSI: SD0.2 U6.1 U7.12 | length 18.5
  Top Layer w0.2: v1(19.3,22.8) SD0.2@26.425,22.8 28.3,22.8 v1(28.6,23.1) ; v1(28.6,24.3) 28.4,24.5 28.4,27.9 28.825,28.325 U7.12@30.05,28.325
  Bottom Layer w0.2: U6.1@18.705,24.9 18.705,23.395 v1(19.3,22.8) ; v1(28.6,23.1) v1(28.6,24.3)
MSCK: SD0.5 U6.2 U7.9 | length 19.9
  Top Layer w0.2: v1(18,23.5) 23,23.5 23.8,24.3 23.8,29.7 24.4,30.3 SD0.5@26.425,30.3 ; SD0.5@26.45,30.275 U7.9@30.05,30.275
  Bottom Layer w0.2: U6.2@17.435,24.9 17.435,23.665 17.6,23.5 v1(18,23.5)
MSCLK: Keyboard(Mouse.8 R18.2 R22.2 | length 7.7
  Top Layer w0.2: R22.2@105.14,31.25 108.26,31.25 108.76,31.75
  Bottom Layer w0.2: R18.2@105.14,31.25 108.26,31.25 108.76,31.75
MSDAT: Keyboard(Mouse.2 R16.2 R20.2 | length 12.3
  Top Layer w0.2: R20.2@105.14,33.75 111.15,33.75 111.25,33.85
  Bottom Layer w0.2: R16.2@105.14,33.75 111.15,33.75 111.25,33.85
MSDCS: D81.2 SD0.1 U7.4 | length 55.6
  Top Layer w0.2: D81.2@5.8,43.16 11.705,37.255 11.705,20.595 v1(12,20.3) ; v1(14.8,20.3) SD0.1@26.425,20.3 33.2,20.3 34.2,21.3 34.2,27.1 34.775,27.675 U7.4@35.75,27.675
  Bottom Layer w0.2: v1(12,20.3) v1(14.8,20.3)
NetAudio_2: Audio.2 C40.1 | length 22.8
  Top Layer w0.2: C40.1@97.54,70.2 100.85,70.2 112.5,81.85 Audio.2@115.5,81.85
NetAudio_3: Audio.3 C42.1 | length 15.8
  Top Layer w0.2: C42.1@97.54,76.2 106,76.2 110,80.2 Audio.3@110,81.85
NetBAT1_1: BAT1.1 D21.2 R46.1 | length 69.4
  Bottom Layer w0.5: D21.2@2.4,36.075 2.4,38.3 ; R46.1@5.3,38.3 2.4,38.3 ; BAT1.1@16.99,86.3 6.99,86.3 1.8,86.3 0.8,85.3 0.8,39.9 2.4,38.3
NetC22_1: C22.1 C24.2 D2.2 U2.3 | length 20
  Top Layer w1: U2.3@95.3,14.93 97.22,14.93 98.2,13.95 C22.1@100.1,13.95 101.3,13.95 101.9,13.35 101.9,10.25 101.25,9.6 99.45,9.6 98.45,8.6 D2.2@98.45,6.25
  Bottom Layer w1: C24.2@97.1,13.55 98.3,13.55 98.7,13.95 C22.1@100.1,13.95
NetC40_2: C40.2 R28.2 | length 4.8
  Top Layer w0.2: R28.2@92.24,68.7 92.24,69.8 92.64,70.2 C40.2@95.74,70.2
NetC41_2: C41.2 R27.2 R28.1 | length 4.7
  Top Layer w0.2: R27.2@94.04,65.7 R28.1@94.04,68.7 ; 94.04,67.2 C41.2@95.74,67.2
NetC42_2: C42.2 R30.1 | length 4.8
  Top Layer w0.2: R30.1@92.24,74.7 92.24,75.8 92.64,76.2 C42.2@95.74,76.2
NetC43_2: C43.2 R29.2 R30.2 | length 4.7
  Top Layer w0.2: R29.2@94.04,71.7 R30.2@94.04,74.7 ; 94.04,73.2 C43.2@95.74,73.2
NetC44_2: C44.2 U10.56 | length 3.6
  Top Layer w0.254: U10.56@49.8,29.15 49.8,27.35 v1(50.05,27.1)
  Bottom Layer w0.5: v1(50.05,27.1) 50.3,27.1 50.55,27.35 C44.2@50.55,28.2
NetC62_1: C62.1 D20.1 D21.1 U9.8 | length 12.7
  Bottom Layer w0.5: D20.1@2.4,25.475 D21.1@2.4,33.725 ; 2.5,27.6 C62.1@3.6,27.6 5.3,27.6 5.695,27.205 U9.8@5.695,26.1
NetD2_1: D2.1 P1.1 | length 3.3
  Top Layer w1: D2.1@102.95,6.25 P1.1@106.3,6.25
NetD3_1: D3.1 U2.4 | length 16.8
  Top Layer w1: U2.4@89,12.65 91.9,12.65 92.1,12.85 92.1,15.85 92.6,16.35 100.3,16.35 100.8,16.85 D3.1@100.8,18.35
NetD8_1: D8.1 R33.1 | length 2.7
  Top Layer w0.2: D8.1@9.7,8.275 9.775,8.35 R33.1@9.775,10.95
NetD16_1: D16.1 R25.1 | length 2.3
  Bottom Layer w0.2: D16.1@8.8,45.7 9.1,45.4 R25.1@11,45.4
NetD17_1: D17.1 R40.1 | length 2
  Top Layer w0.2: D17.1@42,39.4 R40.1@42,41.4
NetD18_1: D18.1 R42.1 | length 2
  Top Layer w0.2: D18.1@37.8,39.4 R42.1@37.8,41.4
NetD19_1: D19.1 R43.1 | length 2
  Top Layer w0.2: D19.1@33.6,39.4 R43.1@33.6,41.4
NetD81_1: D81.1 R331.1 | length 2.3
  Bottom Layer w0.2: R331.1@3.6,45.4 5.5,45.4 D81.1@5.8,45.7
NetQ1_1: Q1.1 R47.2 | length 6.1
  Top Layer w0.2: R47.2@78.6,23.8 78.6,25.5 79.65,26.55 Q1.1@79.65,29.45
NetQ1_3: Q1.3 S1.2 | length 8.1
  Top Layer w0.2: Q1.3@80.6,31.55 80.6,35.9 81.95,37.25 S1.2@81.95,39.1
NetR31_2: R31.2 U10.34 | length 38.3
  Top Layer w0.2: U10.34@55.1,20.35 56.65,20.35 57.2,20.9 70.616,20.9 71.616,21.9 85.1,21.9 87.8,24.6 R31.2@91.65,24.6
NetR35_2: R35.2 U5.14 | length 3.7
  Top Layer w0.2: U5.14@22.9,73.375 24.675,73.375 25.325,72.725 R35.2@26.375,72.725
NetR36_2: R36.2 U5.12 | length 4.4
  Top Layer w0.2: U5.12@22.9,72.075 24.675,72.075 25,71.75 25,71.1 25.325,70.775 R36.2@26.375,70.775
NetR46_2: R46.2 U9.3 | length 8.4
  Bottom Layer w0.3: R46.2@7.1,38.3 8,38.3 8.235,38.065 U9.3@8.235,30.9
NetU9_1: U9.1 XT2.1 | length 8.3
  Bottom Layer w0.2: XT2.1@4.6,36.3 3.6,36.3 3.4,36.1 3.4,31.7 4.2,30.9 U9.1@5.695,30.9
NetU9_2: U9.2 XT2.2 | length 4.8
  Bottom Layer w0.2: XT2.2@4.6,33.76 6.14,33.76 6.965,32.935 U9.2@6.965,30.9 U9.2@7,30.935
OSCI: C53.2 U10.39 XT1.2 | length 16.9
  Top Layer w0.2: U10.39@55.1,22.85 65.95,22.85 XT1.2@67.45,24.35 67.95,24.85 C53.2@67.95,28.1
OSCO: C54.2 U10.40 XT1.1 | length 12.2
  Top Layer w0.2: U10.40@55.1,23.35 61.55,23.35 XT1.1@62.55,24.35 63.95,25.75 C54.2@63.95,28.1
PFLCS: R41.6 U7.5 U10.62 | length 16.2
  Top Layer w0.2: U7.5@35.75,28.325 36.975,28.325 v1(37.2,28.1) 37.4,28.1 v1(39.2,29.9) ; v1(41.2,29.9) 43.2,31.9 45.331,31.9 46.8,30.431 U10.62@46.8,29.15
  Bottom Layer w0.2: R41.6@35.6,28.1 v1(37.2,28.1) ; v1(39.2,29.9) v1(41.2,29.9)
PGEC: J5.5 U10.11 | length 19.3
  Top Layer w0.2: J5.5@35.46,11.6 36.51,10.55 39.25,10.55 40.65,11.95 40.65,21.15 41.85,22.35 U10.11@44,22.35
PGED: J5.4 U10.12 | length 21.9
  Top Layer w0.2: J5.4@32.92,11.6 34.37,10.15 39.416,10.15 41.05,11.784 41.05,20.95 41.95,21.85 U10.12@44,21.85
PMOSI: U7.14 U10.4 | length 19.5
  Top Layer w0.2: U7.14@30.05,27.025 28.925,27.025 28.8,26.9 28.8,24.949 29.049,24.7 29.8,24.7 30.4,24.1 v1(33.2,24.1) ; v1(35.6,24.1) 38.4,24.1 40.15,25.85 U10.4@44,25.85
  Bottom Layer w0.2: v1(33.2,24.1) v1(35.6,24.1)
POWER: Power.2 R37.1 U10.1 | length 58.8
  Top Layer w0.2: Power.2@3.225,9.325 3.225,10.55 5.425,12.75 23.96,12.75 24.26,13.05 25.972,13.05 27.347,14.425 38.325,14.425 39,15.1 39,22.5 39,22.9 40.2,24.1 v1(40.6,24.1) ; v1(40.6,27.5) 40.75,27.35 U10.1@44,27.35
  Bottom Layer w0.2: Power.2@3.225,9.325 4.575,7.975 R37.1@5.825,7.975 ; v1(40.6,24.1) v1(40.6,27.5)
PROG: R26.3 U1.37 U10.54 | length 14.4
  Top Layer w0.2: v1(50.4,31.7) 50.4,31.1 50.8,30.7 U10.54@50.8,29.15 ; v1(50.4,34.7) 50.3,34.8 R26.3@50.3,36.2 50.3,37 50.6,37.3 54.9,37.3 55.3,37.7 U1.37@55.3,38.8
  Bottom Layer w0.2: v1(50.4,31.7) v1(50.4,34.7)
PS2_KBCLK: D6.3 R21.1 U1.58 | length 47.6
  Top Layer w0.2: U1.58@65.8,38.8 65.8,36.686 69.286,33.2 74.384,33.2 79.64,38.456 79.64,40.236 81.304,41.9 91.931,41.9 93.434,40.397 93.434,39.466 94.15,38.75 D6.3@97.29,38.75 R21.1@103.34,38.75
PS2_KBDAT: D4.3 R19.1 U1.57 | length 50.4
  Top Layer w0.2: U1.57@65.3,38.8 65.3,36.62 69.12,32.8 74.55,32.8 80.04,38.29 80.04,40.07 81.47,41.5 91.766,41.5 93.034,40.231 93.034,37.266 94.05,36.25 D4.3@101.29,36.25 R19.1@103.34,36.25
PS2_MSCLK: D7.3 R22.1 U1.55 | length 55.9
  Top Layer w0.2: U1.55@64.3,38.8 64.3,37.199 64.4,37.099 64.4,36.389 68.789,32 74.881,32 80.84,37.959 80.84,39.739 81.801,40.7 91.4,40.7 92.2,39.9 92.2,32.9 93.85,31.25 D7.3@101.29,31.25 R22.1@103.34,31.25
PS2_MSDAT: D5.3 R20.1 U1.56 | length 53.1
  Top Layer w0.2: U1.56@64.8,38.8 64.8,36.554 68.954,32.4 74.716,32.4 80.44,38.124 80.44,39.905 81.635,41.1 91.6,41.1 92.6,40.1 92.6,35.1 93.95,33.75 D5.3@97.29,33.75 R20.1@103.34,33.75
PSCK: U7.11 U10.5 | length 23.6
  Top Layer w0.2: U7.11@30.05,28.975 28.875,28.975 28,28.1 28,24.051 28.351,23.7 29.8,23.7 30.2,23.3 v1(33.2,23.3) ; v1(35.6,23.3) 38.2,23.3 40.25,25.35 U10.5@44,25.35
  Bottom Layer w0.2: v1(33.2,23.3) v1(35.6,23.3)
PSDCS: R41.2 U7.2 U10.63 | length 16.5
  Top Layer w0.2: U7.2@35.75,26.375 36.927,26.375 v1(37.2,26.102) 37.602,26.102 40.8,29.3 41.6,29.3 43.8,31.5 45.166,31.5 46.3,30.366 U10.63@46.3,29.15
  Bottom Layer w0.2: R41.2@35.725,26.375 R41.2@35.6,26.5 36.475,26.5 36.873,26.102 v1(37.2,26.102)
PWR_LED: R33.2 U10.8 | length 42.3
  Top Layer w0.2: R33.2@11.575,10.95 13.025,10.95 13.6,11.525 19.488,11.525 20.313,12.35 24.126,12.35 24.426,12.65 26.137,12.65 27.512,14.025 38.725,14.025 39.6,14.9 v1(39.6,22.3) ; v1(40.8,22.3) 40.8,22.7 41.95,23.85 U10.8@44,23.85
  Bottom Layer w0.2: v1(39.6,22.3) v1(40.8,22.3)
RED: D9.3 R1.1 R2.1 R3.1 R4.1 VGA.1 | length 20.9
  Top Layer w0.2: R4.1@94.04,59.7 97.15,59.7 97.54,60.09 R3.1@97.54,61.2 ; R2.1@94.04,62.7 97.54,62.7 ; R1.1@97.54,64.2 97.54,62.7 ; VGA.1@105.89,64.25 102.84,61.2 D9.3@101.59,61.2 R3.1@97.54,61.2 ; R3.1@97.54,61.2 97.54,62.7
SCL: J4.4 R44.1 U8.6 U9.6 U10.2 | length 82.8
  Top Layer w0.2: v1(8.235,19.465) v1(8.235,24.465) ; v1(8.6,15.9) 9.4,15.9 11.4,13.9 25.69,13.9 27.015,15.225 34.325,15.225 34.6,15.5 34.6,18.5 34.3,18.8 R44.1@33.4,18.8 33.4,19.54 v1(34.36,20.5) 34.6,20.74 34.6,24.666 35.034,25.1 38,25.1 39.75,26.85 U10.2@44,26.85 ; v1(35.76,20.5) 37.96,20.5 38.36,20.1 v1(38.36,17.3) ; v1(41.76,17.3) 42.4,16.66 42.4,8.86 44.84,6.42 J4.4@44.84,5.1
  Bottom Layer w0.2: v1(8.235,19.465) U8.6@8.235,17.7 8.235,16.065 8.4,15.9 v1(8.6,15.9) ; v1(8.235,24.465) U9.6@8.235,26.1 ; v1(34.36,20.5) v1(35.76,20.5) ; v1(38.36,17.3) v1(41.76,17.3)